# EAGLE board 477 (EAGLE 9.3.0)
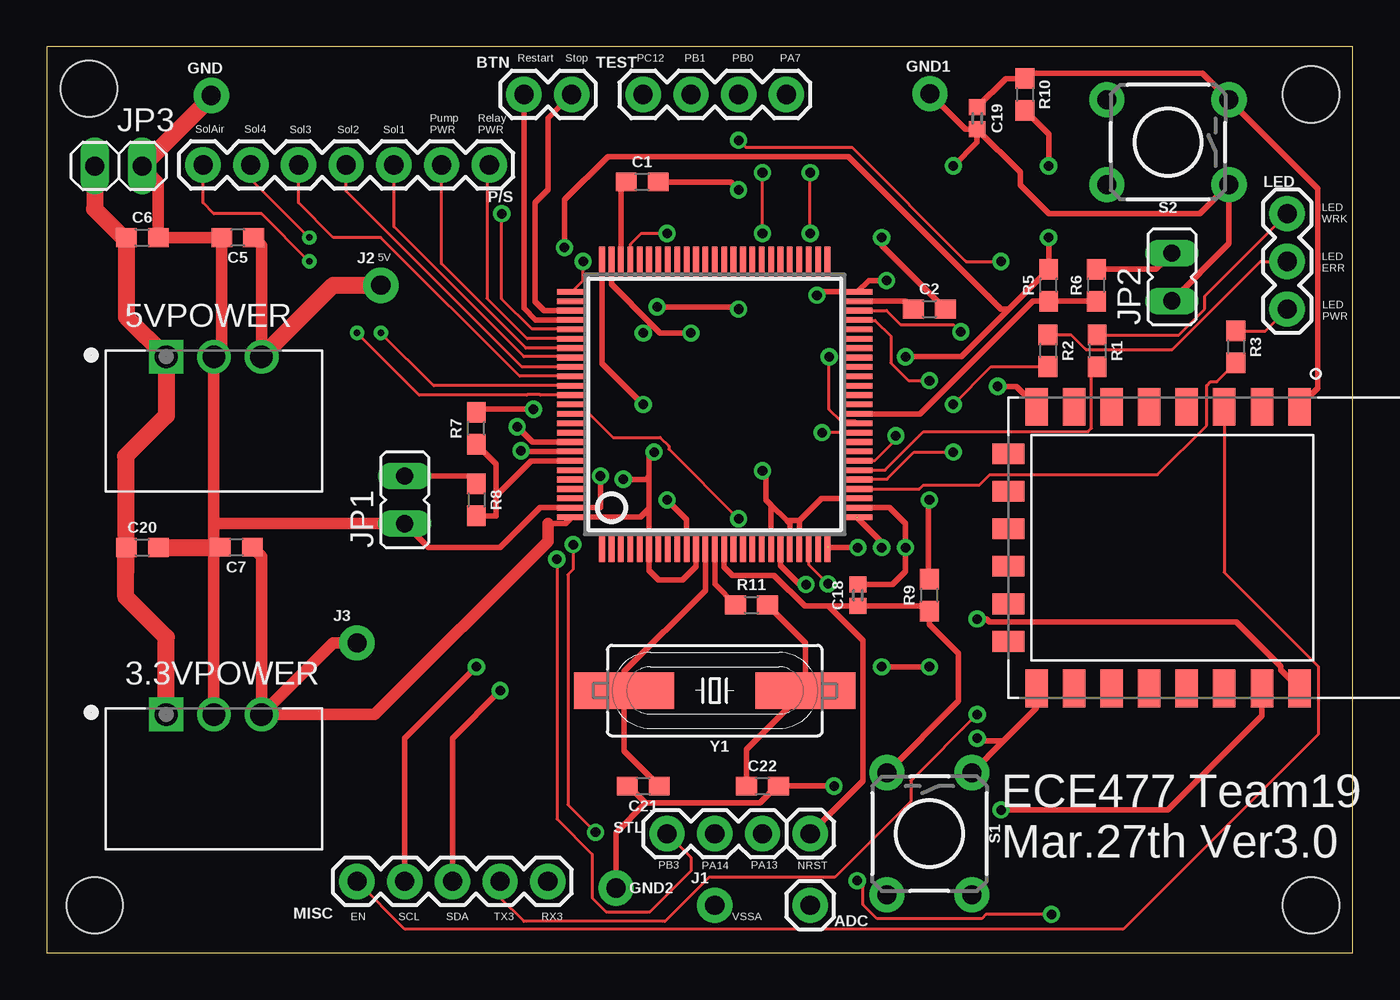
[diagram p0: board, top side]
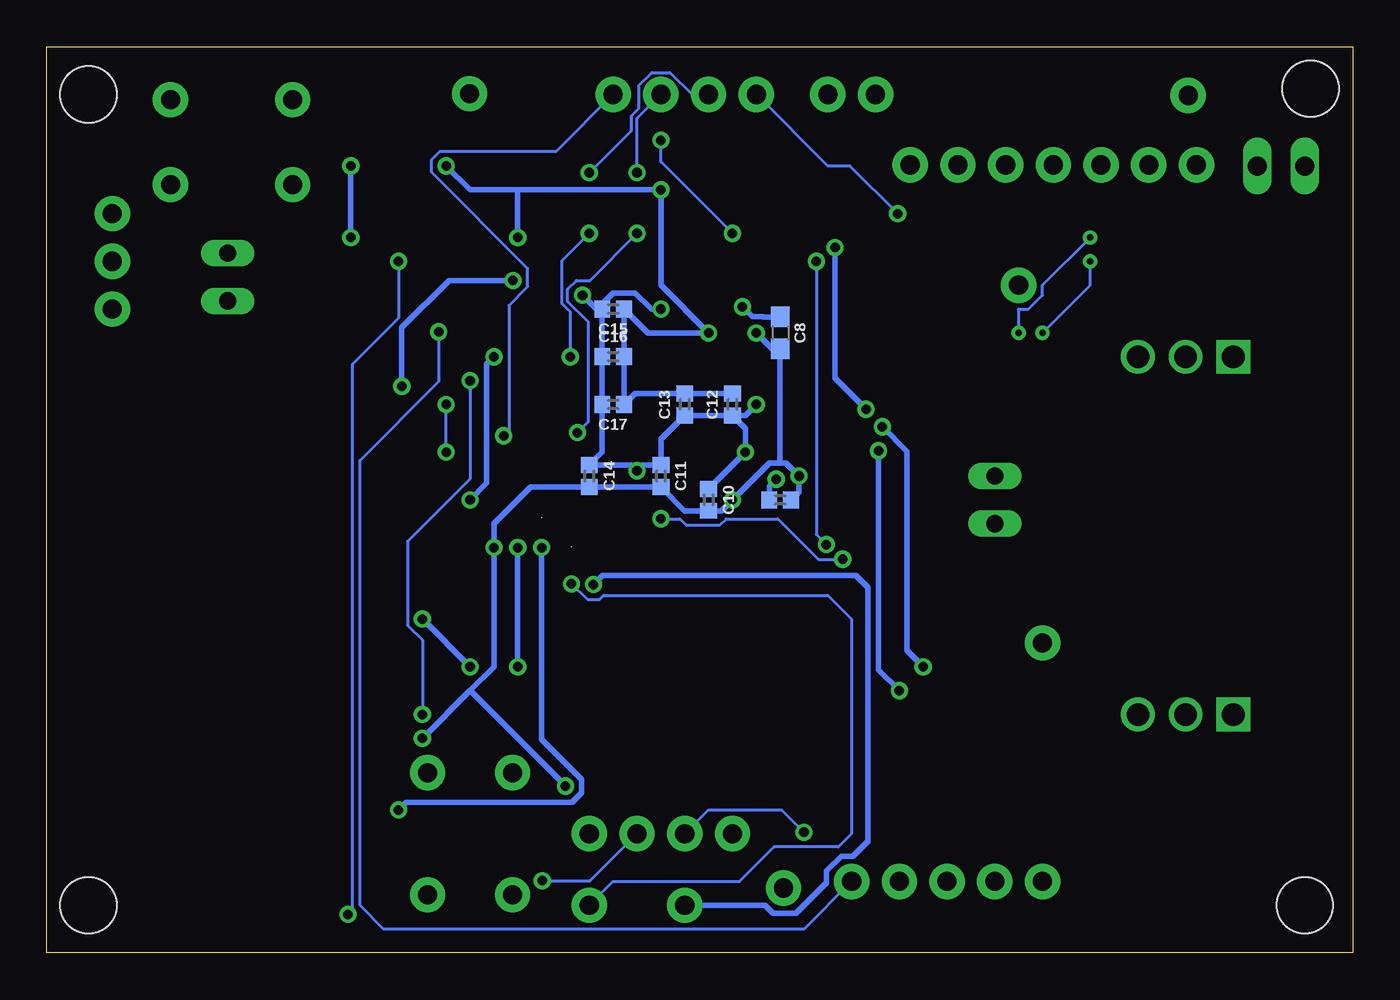
[diagram p1: board, bottom side, seen from below]

Size 69.52 x 48.25 mm. Coordinates in mm from the lower left corner, seen from the top.
Outline: 0,0 69.52,0 69.52,48.25 0,48.25 0,0
Copper layers (1*16): Top 0.035mm / dielectric 1.5mm / Bottom 0.035mm
Design rules "default": minimum track width 6mil, minimum drill 0.35mm, track to track 6mil, track to pad 6mil, pad to pad 6mil, via to via 6mil, smd to smd 6mil, copper to edge 40mil, drill to drill 6mil, minimum pad ring 10mil, minimum via ring 8mil, stop-mask expansion 4mil, vias tented up to drill 0mil, thermal gap 10mil
Net classes: 0 default: width 0.152 mm, drill 0.508 mm, clearance 0.254 mm; 1 sig: width 0.152 mm, drill 0.152 mm, clearance 0.076 mm
Holes 3 mm at 67.31,2.54 2.54,2.54 2.24,46.02 67.31,45.72

## Footprints (pad centres in the part's own frame; a part is rotated, then mirrored left to right if it is on the bottom)
CONV_VXO7803-1000 = drill 1.2 square: 1 0,0 | drill 1.2: 2 2.54,0; 3 5.08,0
CONV_VXO7805-1000 = drill 1.2 square: 1 0,0 | drill 1.2: 2 2.54,0; 3 5.08,0
1X01 = drill 1.016 pad 1.88: 1 0,0
1X02 = drill 1.016 pad 1.88: 1 0,0; 2 2.54,0
0603 = smd 1.1 x 1: 1 -0.85,0; 2 0.85,0
0402 = smd 0.85 x 0.9: 1 -0.58,0; 2 0.58,0
1X01_NO_SILK = drill 1.016 pad 1.88: 1 0,0
QFP50P1600X1600X160-100N = smd 0.3 x 1.6: 1 -6,-7.6; 2 -5.5,-7.6; 3 -5,-7.6; 4 -4.5,-7.6; 5 -4,-7.6; 6 -3.5,-7.6; 7 -3,-7.6; 8 -2.5,-7.6; 9 -2,-7.6; 10 -1.5,-7.6; 11 -1,-7.6; 12 -0.5,-7.6; 13 0,-7.6; 14 0.5,-7.6; 15 1,-7.6; 16 1.5,-7.6; 17 2,-7.6; 18 2.5,-7.6; 19 3,-7.6; 20 3.5,-7.6; 21 4,-7.6; 22 4.5,-7.6; 23 5,-7.6; 24 5.5,-7.6; 25 6,-7.6; 51 6,7.6; 52 5.5,7.6; 53 5,7.6; 54 4.5,7.6; 55 4,7.6; 56 3.5,7.6; 57 3,7.6; 58 2.5,7.6; 59 2,7.6; 60 1.5,7.6; 61 1,7.6; 62 0.5,7.6; 63 0,7.6; 64 -0.5,7.6; 65 -1,7.6; 66 -1.5,7.6; 67 -2,7.6; 68 -2.5,7.6; 69 -3,7.6; 70 -3.5,7.6; 71 -4,7.6; 72 -4.5,7.6; 73 -5,7.6; 74 -5.5,7.6; 75 -6,7.6 | smd 1.6 x 0.3: 26 7.6,-6; 27 7.6,-5.5; 28 7.6,-5; 29 7.6,-4.5; 30 7.6,-4; 31 7.6,-3.5; 32 7.6,-3; 33 7.6,-2.5; 34 7.6,-2; 35 7.6,-1.5; 36 7.6,-1; 37 7.6,-0.5; 38 7.6,0; 39 7.6,0.5; 40 7.6,1; 41 7.6,1.5; 42 7.6,2; 43 7.6,2.5; 44 7.6,3; 45 7.6,3.5; 46 7.6,4; 47 7.6,4.5; 48 7.6,5; 49 7.6,5.5; 50 7.6,6; 76 -7.6,6; 77 -7.6,5.5; 78 -7.6,5; 79 -7.6,4.5; 80 -7.6,4; 81 -7.6,3.5; 82 -7.6,3; 83 -7.6,2.5; 84 -7.6,2; 85 -7.6,1.5; 86 -7.6,1; 87 -7.6,0.5; 88 -7.6,0; 89 -7.6,-0.5; 90 -7.6,-1; 91 -7.6,-1.5; 92 -7.6,-2; 93 -7.6,-2.5; 94 -7.6,-3; 95 -7.6,-3.5; 96 -7.6,-4; 97 -7.6,-4.5; 98 -7.6,-5; 99 -7.6,-5.5; 100 -7.6,-6
JP1 = drill 0.914 long: 1 0,-1.27; 2 0,1.27
1X02' = drill 1.016 long: 1 -1.27,0; 2 1.27,0
1X03 = drill 1.016 pad 1.88: 1 0,0; 2 2.54,0; 3 5.08,0
1X05 = drill 1.016 pad 1.88: 1 0,0; 2 2.54,0; 3 5.08,0; 4 7.62,0; 5 10.16,0
1X07 = drill 1.016 pad 1.88: 1 0,0; 2 2.54,0; 3 5.08,0; 4 7.62,0; 5 10.16,0; 6 12.7,0; 7 15.24,0
TACTILE_SWITCH_PTH_6.0MM_KIT = drill 1.016 pad 1.88: 1 -3.251,2.261; 2 3.251,2.261; 3 -3.251,-2.261; 4 3.251,-2.261
1X04 = drill 1.016 pad 1.88: 1 0,0; 2 2.54,0; 3 5.08,0; 4 7.62,0
XCVR_ESP8266-12E/ESP-12E = smd 2 x 1.2: 1 -7.5,7; 2 -7.5,5; 3 -7.5,3; 4 -7.5,1; 5 -7.5,-1; 6 -7.5,-3; 7 -7.5,-5; 8 -7.5,-7; 15 7.5,-7; 16 7.5,-5; 17 7.5,-3; 18 7.5,-1; 19 7.5,1; 20 7.5,3; 21 7.5,5; 22 7.5,7 | smd 1.1 x 1.7: 9 -5,-8.5; 10 -3,-8.5; 11 -1,-8.5; 12 1,-8.5; 13 3,-8.5; 14 5,-8.5
HC49UP = smd 5.334 x 1.93: 1 -4.826,0; 2 4.826,0

## Placement (x,y rotation side)
3.3VPOWER  VXO7803-1000  [CONV_VXO7803-1000]  6.35,12.7 0 top
5VPOWER  VXO7805-1000  [CONV_VXO7805-1000]  6.35,31.75 0 top
ADC  [1X01]  40.64,2.54 0 top
BTN  [1X02]  25.4,45.72 0 top
C1  4.7uF  [0603]  31.69,41.06 0 top
C2  4.7uF  [0603]  46.99,34.29 0 top
C5  10uF  [0603]  10.16,38.1 180 top
C6  10uF  [0603]  5.08,38.1 0 top
C7  10uF  [0603]  10.09,21.61 180 top
C8  10uF  [0603]  30.48,33.02 270 bottom
C9  0.1uF  [0402]  30.48,24.13 0 bottom
C10  0.1uF  [0402]  34.29,24.13 270 bottom
C11  0.1uF  [0402]  36.83,25.4 270 bottom
C12  0.1uF  [0402]  33.02,29.21 90 bottom
C13  0.1uF  [0402]  35.56,29.21 90 bottom
C14  1.0uF  [0402]  40.64,25.4 270 bottom
C15  1.0uF  [0402]  39.37,34.29 180 bottom
C16  0.1uF  [0402]  39.37,31.75 0 bottom
C17  0.1uF  [0402]  39.37,29.21 180 bottom
C18  0.1uF  [0402]  43.18,19.05 90 top
C19  0.1uF  [0402]  49.53,44.45 270 top
C20  10uF  [0603]  5.08,21.59 0 top
C21  20pF  [0603]  31.75,8.89 180 top
C22  20pF  [0603]  38.1,8.89 0 top
GND  [1X01_NO_SILK]  8.75,45.67 0 top
GND1  [1X01_NO_SILK]  47.02,45.76 0 top
GND2  [1X01_NO_SILK]  30.31,3.46 90 top
IC2  STM32F407VGT6  [QFP50P1600X1600X160-100N]  35.56,29.21 0 top
J1  [1X01_NO_SILK]  35.56,2.54 0 top
J2  [1X01_NO_SILK]  17.78,35.56 0 top
J3  [1X01_NO_SILK]  16.51,16.51 0 top
JP1  [JP1]  19.05,24.13 0 top
JP2  [JP1]  59.9,36 0 top
JP3  [1X02']  3.81,41.91 0 top
LED  [1X03]  66.04,39.37 270 top
MISC  [1X05]  26.67,3.81 180 top
NRST  [1X01]  40.64,6.35 0 top
P/S  [1X07]  23.55,41.97 180 top
R1  150  [0603]  55.92,32.07 270 top
R2  150  [0603]  53.3,32.08 270 top
R3  150  [0603]  63.3,32.28 270 top
R5  10k  [0603]  53.34,35.56 90 top
R6  510  [0603]  55.88,35.56 90 top
R7  10k  [0603]  22.86,27.94 90 top
R8  10k  [0603]  22.86,24.13 270 top
R9  10k  [0603]  46.99,19.05 90 top
R10  10k  [0603]  52.07,45.72 270 top
R11  220  [0603]  37.52,18.54 0 top
S1  MOMENTARY-SWITCH-SPST-PTH-6.0MM-KIT  [TACTILE_SWITCH_PTH_6.0MM_KIT]  46.99,6.35 270 top
S2  MOMENTARY-SWITCH-SPST-PTH-6.0MM-KIT  [TACTILE_SWITCH_PTH_6.0MM_KIT]  59.69,43.18 180 top
STL  [1X03]  33.02,6.35 0 top
TEST  [1X04]  31.75,45.72 0 top
U2  ESP8266-12E/ESP-12E  [XCVR_ESP8266-12E/ESP-12E]  59.69,21.59 270 top
Y1  8MHz  [HC49UP]  35.56,13.97 180 top

## Library data of the parts
3.3VPOWER = VXO7803-1000; AVAILABILITY: Unavailable; CUI_PURCHASE_URL: https://www.cui.com/product/power/dc-dc-converters/non-isolated/vxo78-1000-series?utm_source=snapeda.com&utm_medium=referral&utm_campaign=snapedaBOM; DESCRIPTION: VXO78-1000 Series 24 Vin 3.3 Vout Non-Isolated Open Frame DC Switching Regulator; MF: CUI Inc.; MP: VXO7803-1000; PACKAGE: SIP-3 CUI; PRICE: None
5VPOWER = VXO7805-1000; AVAILABILITY: Unavailable; CUI_PURCHASE_URL: https://www.cui.com/product/power/dc-dc-converters/non-isolated/vxo78-1000-series?utm_source=snapeda.com&utm_medium=referral&utm_campaign=snapedaBOM; DESCRIPTION: VXO78-1000 Series 24 / 12 Vin ±5 Vout Non-Isolated DC Switching Regulator; MF: CUI Inc.; MP: VXO7805-1000; PACKAGE: SIP-3 CUI; PRICE: None
ADC BTN GND GND1 GND2 J1-J3 LED MISC NRST P/S STL = SparkFun-Connectors
C1 C2 = SparkFun-Capacitors; PROD_ID: CAP-08280
C5-C8 C20 = SparkFun-Capacitors; PROD_ID: CAP-11015
C9-C13 C16-C19 = SparkFun-Capacitors; PROD_ID: CAP-12416
C14 C15 = SparkFun-Capacitors; PROD_ID: CAP-12417
C21 C22 = SparkFun-Capacitors; PROD_ID: CAP-08267
IC2 = STM32F407VGT6; AVAILABILITY: Unavailable; DESCRIPTION: STM32 Series 32-bit 1 MB Flash 192 kB RAM ARM Based Microcontroller - LQFP-100; MF: STMicroelectronics; MP: STM32F407VGT6; PACKAGE: LQFP-100 STMicroelectronics; PRICE: None
JP1 JP2 = jumper
JP3 = pinhead
R1-R3 = SparkFun-Resistors; PROD_ID: RES-11028
R5 = SparkFun-Resistors; PROD_ID: RES-07856
R6 = SparkFun-Resistors; PROD_ID: RES-12535
R7-R10 = SparkFun-Resistors; PROD_ID: RES-00824
R11 = SparkFun-Resistors; PROD_ID: RES-08296
S1 S2 = SparkFun-Switches; PROD_ID: SWCH-08441; SF_SKU: COM-00097
TEST = SparkFun-Connectors; PROD_ID: CONN-09696
U2 = ESP8266-12E_ESP-12E; AVAILABILITY: Unavailable; DESCRIPTION: This WiFi module has a 32-bit MCU micro and clock speeds supporting 80 MHz or 160 MHz. Supports the RTOS and integrated Wi-Fi MAC/BB/RF/PA/LNA, and has an on-board antenna.; MF: AI-Thinker; MP: ESP8266-12E/ESP-12E; PACKAGE: None; PRICE: None
Y1 = SparkFun-Clocks; PROD_ID: XTAL-11706

## Nets
3V: 3.3VPOWER.3 C7.1 C8.1 C9.1 C10.1 C11.1 C12.1 C13.1 C14.1 C15.2 C16.1 C17.2 IC2.6 IC2.11 IC2.19 IC2.21 IC2.22 IC2.28 IC2.50 IC2.75 IC2.100 J3.1 U2.8
5V: 5VPOWER.3 C5.1 J2.1
12V: 3.3VPOWER.1 5VPOWER.1 C6.1 C20.1 JP3.1
ADC [sig]: ADC.1 IC2.23
B/RSTA [sig]: BTN.1 IC2.79
B/STP [sig]: BTN.2 IC2.78
BOOT0 [sig]: IC2.94 R7.1 R8.2
BOOT1 [sig]: IC2.37 R5.1 R6.1
EN: MISC.5 U2.3
GND: 3.3VPOWER.2 5VPOWER.2 C1.2 C2.2 C5.2 C6.2 C7.2 C8.2 C9.2 C10.2 C11.2 C12.2 C13.2 C14.2 C15.1 C16.2 C17.1 C18.2 C19.2 C20.2 C21.2 C22.2 GND1.1 GND2.1 GND.1 IC2.10 IC2.27 IC2.74 IC2.99 JP1.1 JP2.1 JP3.2 S1.1 S2.1 U2.15
L/ERR [sig]: LED.2 R2.1
L/PWR [sig]: LED.3 R3.1
L/WRK [sig]: LED.1 R1.1
N$1: IC2.29 R3.2
N$2: IC2.30 R2.2
N$3 [sig]: IC2.13 R11.1
N$4: IC2.31 R1.2
N$10 [sig]: C21.1 IC2.12 Y1.2
N$13 [sig]: C22.1 R11.2 Y1.1
N$15 [sig]: C1.1 IC2.73
N$16: JP2.2 R6.2
N$17 [sig]: C2.1 IC2.49
N$19: IC2.20 J1.1
N$23: JP1.2 R8.1
NRST: C18.1 IC2.14 NRST.1 R9.1 S1.3
P/PUMP [sig]: IC2.82 P/S.2
P/RLY: IC2.81 P/S.1
PA7: IC2.32 TEST.4
PA13: IC2.72 STL.3
PA14: IC2.76 STL.2
PB0 [sig]: IC2.35 TEST.3
PB1 [sig]: IC2.36 TEST.2
PB3: IC2.89 STL.1
PC12: IC2.80 TEST.1
RESET: C19.1 R10.1 S2.3 U2.1
RX2: IC2.26 U2.22
RX3: IC2.48 MISC.1
SCL [sig]: IC2.92 MISC.4
SDA [sig]: IC2.93 MISC.3
SOL1 [sig]: IC2.83 P/S.3
SOL2 [sig]: IC2.84 P/S.4
SOL3 [sig]: IC2.85 P/S.5
SOL4 [sig]: IC2.86 P/S.6
SOLAIR [sig]: IC2.87 P/S.7
TX2: IC2.25 U2.21
TX3: IC2.47 MISC.2
VDD: R5.2 R7.2 R9.2 R10.2

## Tracks (layer width: path | path; a pad name or v marks a point on that pad's centre or on a via)
3V  (via drill 0.51)
  Top 0.305: v50.62,30.18 51.61,30.18 52.58,29.21 U2.8 | 32.06,23.66 IC2.6 32.06,20.36 32.56,19.86 33.84,19.86 34.56,20.59 IC2.11 | 32.06,23.66 32.06,25.4 | 32.06,25.4 32.06,26.4 v32.33,26.67 | v38.1,25.68 38.29,25.49 38.29,24.13 38.56,23.86 | 26.67,22.86 27.61,22.86 IC2.100 31.61,23.21 32.06,23.66 | 38.56,23.86 39.4,23.02 | 39.4,23.02 40.06,23.02 | IC2.22 40.06,23.02 | IC2.19 38.56,23.86 | IC2.28 41.25,24.21 40.06,23.02 | v41,35.03 41.18,35.21 IC2.50 43.76,35.81 v44.7,35.81 | IC2.75 29.56,31.4 v31.75,29.21 | v32.49,34.41 36.71,34.41 v36.83,34.29 | IC2.21 39.56,22.86 39.4,23.02 | v30.68,25.23 31.89,25.23 32.06,25.4
  Top 0.61: 3.3VPOWER.3 11.43,21.11 C7.1 | 3.3VPOWER.3 17.45,12.7 26.67,21.92 26.67,22.86 | 3.3VPOWER.3 15.24,16.51 J3.1
  Bottom 0.305: v50.62,30.18 50.62,33.3 48.11,35.81 v44.7,35.81 | C12.1 C13.1 36.83,27.36 C11.1 37.8,25.98 v38.1,25.68 38.4,25.98 C14.1 39.95,26.67 C17.2 C16.1 C15.2 40.24,34.29 | C12.1 32.33,27.94 v32.33,26.67 C10.1 | v41,35.03 40.26,34.29 40.24,34.29 | v31.75,29.21 32.33,28.63 C12.1 | C8.1 31.38,33.87 31.39,33.88 31.96,33.88 v32.49,34.41 | v36.83,34.29 37.34,34.29 38.2,35.15 39.38,35.15 40.24,34.29 | C9.1 31.06,24.85 v30.68,25.23
5V
  Top 0.61: C5.1 11.43,37.68 5VPOWER.3
  Top 0.914: 5VPOWER.3 15.24,35.56 J2.1
12V
  Top 0.914: 3.3VPOWER.1 6.35,16.8 4.2,18.96 4.2,20.32 | 4.2,20.32 4.2,21.56 C20.1 | 4.2,20.32 4.19,20.33 4.19,26.46 6.35,28.62 5VPOWER.1 4.23,33.87 C6.1 4.06,38.1 2.54,39.62 JP3.1
ADC  (via drill 0.51)
  Top 0.152: IC2.23 40.56,20.69 v41.59,19.66
  Bottom 0.152: v41.59,19.66 41.57,19.66 40.75,18.83 40.09,18.83 39.88,19.05 27.94,19.05 26.67,17.78 26.67,6.35 27.38,5.64 30.8,5.64 32.63,3.81 39.37,3.81 ADC.1
B/RSTA
  Top 0.305: BTN.1 25.4,34.33 26.02,33.71 IC2.79
B/STP
  Top 0.305: BTN.2 26.67,44.45 26.67,40.64 25.99,39.96 25.99,34.68 26.46,34.21 IC2.78
BOOT0
  Top 0.152: 23.92,24.38 23.88,24.38 23.92,24.34
  Top 0.305: IC2.94 25.79,26.21 23.92,24.34 | 23.92,24.34 23.92,24.38 23.92,26.03 R7.1 | 23.92,24.34 23.92,23.28 R8.2
BOOT1
  Top 0.305: R6.1 R5.1 52.49,34.71 46.49,28.71 IC2.37
EN
  Top 0.152: U2.3 62.69,20.27 67.7,15.26 67.7,11.65 57.31,1.27 19.05,1.27 MISC.5
GND  (via drill 0.51)
  Top 0.305: C19.2 51.83,41.57 51.83,40.88 53.34,39.37 61.39,39.37 S2.1 62.94,37.77 JP2.1 | JP1.1 20.32,21.59 24.13,21.59 26.25,23.71 IC2.99 29.47,23.71 v29.47,25.4 | U2.15 52.69,13.04 50.94,11.29 | 50.94,11.29 S1.1 | C18.2 45.03,19.63 45.72,20.32 v45.72,21.59 45.72,22.86 44.87,23.71 IC2.27 | v49.53,11.43 49.67,11.29 50.94,11.29 | v41.91,8.89 C22.2 38.88,8.89 37.97,7.98 31.88,7.98 | IC2.10 34.06,23.09 v33.02,24.13 | IC2.74 30.06,35.61 32.2,33.47 | v34.29,33.02 32.65,33.02 32.2,33.47 | C21.2 30.98,8.89 31.88,7.98 | C19.2 49.53,43.18 v48.26,41.91 | v31.75,33.02 32.2,33.47 | 32.2,33.47 | GND1.1 48.91,43.87 C19.2 | C1.2 36.41,41.06 v36.83,40.64 | C2.2 44.45,37.68 v44.45,38.1 | 31.88,7.98 30.31,6.41 GND2.1
  Top 0.61: 3.3VPOWER.2 8.89,21.26 C7.2 8.89,21.95 8.89,22.86 | 8.89,22.86 5VPOWER.2 9.31,32.17 C5.2 C6.2 5.93,41.06 JP3.2 | JP1.1 8.89,22.86
  Top 0.914: C20.2 9.22,21.59 C7.2 | JP3.2 8.75,45.58 GND.1
  Bottom 0.305: C12.2 C13.2 38.21,29.79 C17.1 C16.2 C15.1 37.52,33.02 v34.29,33.02 36.83,35.56 v36.83,40.64 44.45,40.64 | 30.48,26.09 30.16,26.09 v29.47,25.4 29.47,24.56 C9.2 | 46.99,13.97 45.72,15.24 v45.72,21.59 45.72,22.86 43.76,24.82 C14.2 C11.2 35.56,23.55 C10.2 33.6,23.55 v33.02,24.13 31.06,26.09 30.48,26.09 | 46.99,13.97 v49.53,11.43 | v41.91,8.89 46.99,13.97 | v48.26,41.91 46.99,40.64 44.45,40.64 | v31.75,33.02 30.9,32.17 C8.2 30.48,26.09 | v44.45,38.1 44.45,40.64
L/ERR
  Top 0.152: LED.2 64.61,36.83 59.92,32.14 55.32,32.14 54.53,32.93 R2.1
L/PWR
  Top 0.152: R3.1 64.88,33.13 LED.3
L/WRK
  Top 0.152: LED.1 61.65,34.98 61.65,34.29 60.27,32.92 R1.1
N$1
  Top 0.152: IC2.29 46.46,24.71 46.66,24.92 49.65,24.92 50.2,25.47 59.14,25.47 61.76,28.09 61.76,30.23 61.95,30.42 62.3,30.42 R3.2
N$2  (via drill 0.51)
  Top 0.152: IC2.30 43.18,25.23 44.73,25.23 46.17,26.67 v48.26,26.67 | v48.26,29.21 50.28,31.23 R2.2
  Bottom 0.152: v48.26,26.67 v48.26,29.21
N$3
  Top 0.305: IC2.13 35.56,19.64 R11.1
N$4
  Top 0.152: IC2.31 44.63,25.71 46.68,27.76 55.43,27.76 55.62,27.95 55.62,30.92 R1.2
N$10
  Top 0.305: IC2.12 35.06,19.32 30.73,14.99 Y1.2 30.73,10.76 C21.1
N$13
  Top 0.305: R11.2 40.39,16.52 Y1.1 37.25,10.83 C22.1
N$15
  Top 0.305: IC2.73 30.56,40.78 C1.1
N$16
  Top 0.305: R6.2 59.04,36.41 JP2.2
N$17
  Top 0.305: IC2.49 45.72,34.71 C2.1
N$19  (via drill 0.51)
  Top 0.305: IC2.20 39.06,20.63 40.07,19.62 v40.42,19.62
  Bottom 0.305: v40.42,19.62 39.94,20.1 26.45,20.1 25.8,19.45 25.8,5.95 26.59,5.16 27.23,5.16 28.02,4.37 28.02,3.73 29.64,2.11 30.86,2.11 31.29,2.54 J1.1
N$23
  Top 0.305: JP1.2 22.44,25.4 R8.1
NRST
  Top 0.305: IC2.14 36.06,20.54 36.5,20.11 38.71,20.11 40.35,18.47 41.62,18.47 | 41.62,18.47 C18.1 46.72,18.47 R9.1 46.99,17.49 48.54,15.94 48.54,13.41 S1.3 | NRST.1 43.46,9.17 43.46,16.63 41.62,18.47
P/PUMP
  Top 0.152: IC2.82 25.5,32.21 21.01,36.7 P/S.2
P/RLY
  Top 0.152: IC2.81 25.58,32.71 23.43,34.86 23.43,41.84 P/S.1
PA7  (via drill 0.51)
  Top 0.152: IC2.32 43.18,26.23 44.1,26.23 45.2,27.34 v45.2,27.54
  Bottom 0.152: v45.2,27.54 44.93,27.82 44.93,34.48 43.92,35.49 43.92,36.45 49.05,41.58 49.05,42.24 48.59,42.7 42.39,42.7 TEST.4
PA13  (via drill 0.51)
  Top 0.152: IC2.72 31.08,36.83 31.08,37.75 31.65,38.32 v33.02,38.32 | v36.83,43.28 37.21,42.9 42.87,42.9 48.94,36.83 v50.8,36.83 | v53.49,2.06 50.01,2.06 49.78,1.83 44.2,1.83 43.46,2.57 43.46,3.53 v43.14,3.85
  Bottom 0.152: v33.02,38.32 36.83,42.13 v36.83,43.28 | v50.8,36.83 50.8,33.8 53.26,31.34 53.26,2.28 v53.49,2.06 | v43.14,3.85 40.6,3.85 STL.3
PA14  (via drill 0.51)
  Top 0.152: IC2.76 28.55,35.8 v28.55,36.83 | v28.02,21.75 28.02,20.43 27.74,20.15 27.74,7.9 v29.21,6.43
  Bottom 0.152: v28.55,36.83 28.55,22.29 v28.02,21.75 | v29.21,6.43 30.4,7.62 34.29,7.62 STL.2
PB0  (via drill 0.51)
  Top 0.152: IC2.35 v41.28,27.71 v41.27,27.71 | v38.1,38.32 v38.1,41.55
  Bottom 0.152: v41.27,27.71 40.72,28.27 40.72,33.63 41.79,34.7 41.79,35.35 41.33,35.81 40.61,35.81 v38.1,38.32 | v38.1,41.55 38.1,44.45 TEST.3
PB1  (via drill 0.51)
  Top 0.152: IC2.36 43.04,28.33 42.27,28.33 41.65,28.95 v41.65,31.75 | v40.64,38.32 v40.64,41.55
  Bottom 0.152: v41.65,31.75 41.65,34.13 42.09,34.57 42.09,36.87 v40.64,38.32 | v40.64,41.55 38.41,43.79 38.41,44.58 38,44.98 38,46.2 37.31,46.89 36.35,46.89 35.18,45.72 TEST.2
PB3  (via drill 0.51)
  Top 0.152: IC2.89 27.98,28.69 28.9,28.69 30.13,27.46 32.66,27.46 33.12,27 33.12,26.83 v36.83,23.12 | v27.15,20.96 27.15,7.14 29.04,5.25 29.04,2.93 29.78,2.19 32.1,2.19 34.29,4.37 34.29,5.08 STL.1
  Bottom 0.152: v27.15,20.96 28.45,20.96 30.6,23.12 33.35,23.12 33.67,22.79 35.49,22.79 35.81,23.12 v36.83,23.12
PC12  (via drill 0.51)
  Top 0.152: IC2.80 27.94,33.23 25.82,33.23 24.22,34.83 v24.22,39.37
  Bottom 0.152: v24.22,39.37 26.76,41.91 27.94,41.91 TEST.1
RESET
  Top 0.305: C19.1 51.07,46.57 R10.1 52.35,46.85 61.53,46.85 S2.3 67.68,40.7 67.68,30.08 U2.1
RX2  (via drill 0.51)  (1 unrouted)
  Top 0.305: U2.22 65.7,15.08 65.7,15.26 63.32,17.63 50.17,17.63 50.02,17.78 v49.53,17.78 | v46.99,15.24 v44.45,15.24 | v44.45,21.59 44.45,21.86 43.16,23.15
  Bottom 0.305: v49.53,17.78 v46.99,15.24 | v44.45,15.24 v44.45,21.59
RX3  (via drill 0.51)
  Top 0.152: v48.66,33.08 48.28,33.46 45.45,33.46 44.7,34.21 IC2.48
  Bottom 0.152: v48.66,33.08 48.66,30.43 52.86,26.23 52.86,2.54 51.59,1.27 29.21,1.27 MISC.1
SCL  (via drill 0.51)
  Top 0.305: IC2.92 25.85,27.21 v25.04,28.02 | v22.86,15.24 19.05,11.43 MISC.4
  Bottom 0.305: v25.04,28.02 23.73,26.72 23.73,16.11 v22.86,15.24
SDA  (via drill 0.51)
  Top 0.305: IC2.93 25.27,26.71 v25.24,26.74 | v24.13,13.97 21.59,11.43 MISC.3
  Bottom 0.305: v25.24,26.74 25.24,15.08 v24.13,13.97
SOL1
  Top 0.152: IC2.83 27.92,31.75 25.4,31.75 18.47,38.68 P/S.3
SOL2
  Top 0.152: IC2.84 25.3,31.21 15.93,40.57 P/S.4
SOL3
  Top 0.152: IC2.85 25.17,30.71 17.78,38.1 15.24,38.1 13.39,39.95 P/S.5
SOL4  (via drill 0.35)
  Top 0.152: IC2.86 20.59,30.21 v17.78,33.02 | v13.97,38.1 10.85,41.22 P/S.6
  Bottom 0.152: v17.78,33.02 17.78,34.29 17.25,34.29 16.51,35.03 16.51,35.56 v13.97,38.1
SOLAIR  (via drill 0.35)
  Top 0.152: v16.51,33.02 19.82,29.71 25.55,29.71 25.58,29.74 26.23,29.74 26.27,29.71 IC2.87 | v13.97,36.83 11.43,39.37 8.89,39.37 8.31,39.95 P/S.7
  Bottom 0.152: v16.51,33.02 13.97,35.56 v13.97,36.83
TX2  (via drill 0.51)  (1 unrouted)
  Top 0.305: U2.21 64.69,12.62 59.69,7.62 v50.8,7.62 | v43.18,21.59 41.64,21.59 41.62,21.61
  Bottom 0.305: v43.18,21.59 43.18,11.38 41.05,9.25 41.05,8.53 41.55,8.03 50.39,8.03 v50.8,7.62
TX3  (via drill 0.51)
  Top 0.152: IC2.47 43.18,33.69 44.1,33.69 44.93,32.85 44.93,31.42 45.88,30.48 v46.99,30.48 | v49.53,12.7 46,9.17 46,8.09 41.95,4.04 35.26,4.04 32.9,1.68 25.4,1.68 24.13,2.95 MISC.2
  Bottom 0.152: v46.99,30.48 46.99,25.24 50.32,21.92 50.32,17.45 49.53,16.67 v49.53,12.7
VDD  (via drill 0.51)
  Top 0.305: R10.2 53.34,43.6 v53.34,41.91 | v53.34,38.1 R5.2 51.14,34.21 | 51.14,34.21 48.68,31.75 v45.72,31.75 | v25.91,28.96 22.86,28.96 R7.2 | v27.56,37.57 27.56,40.11 29.87,42.42 42.67,42.42 50.8,34.29 51.05,34.29 51.14,34.21 | R9.2 46.94,19.99 46.94,24.04 v46.99,24.13
  Bottom 0.305: v53.34,41.91 v53.34,38.1 | v45.72,31.75 46.1,31.37 46.1,25.02 v46.99,24.13 | v25.91,28.96 27.56,30.61 v27.56,37.57

## Text on the board
tPlace: Restart | Stop | PC12 | PB1 | PB0 | PA7 | SolAir | Sol4 | Sol3 | Sol2 | Sol1 | Pump / PWR | Relay / PWR | LED / WRK | 5V | LED / ERR | LED / PWR | ECE477 Team19 / Mar.27th Ver3.0 | PB3 | PA14 | PA13 | NRST | EN | SCL | SDA | TX3 | RX3 | VSSA